# EAGLE board untitled (EAGLE 7.6.0)
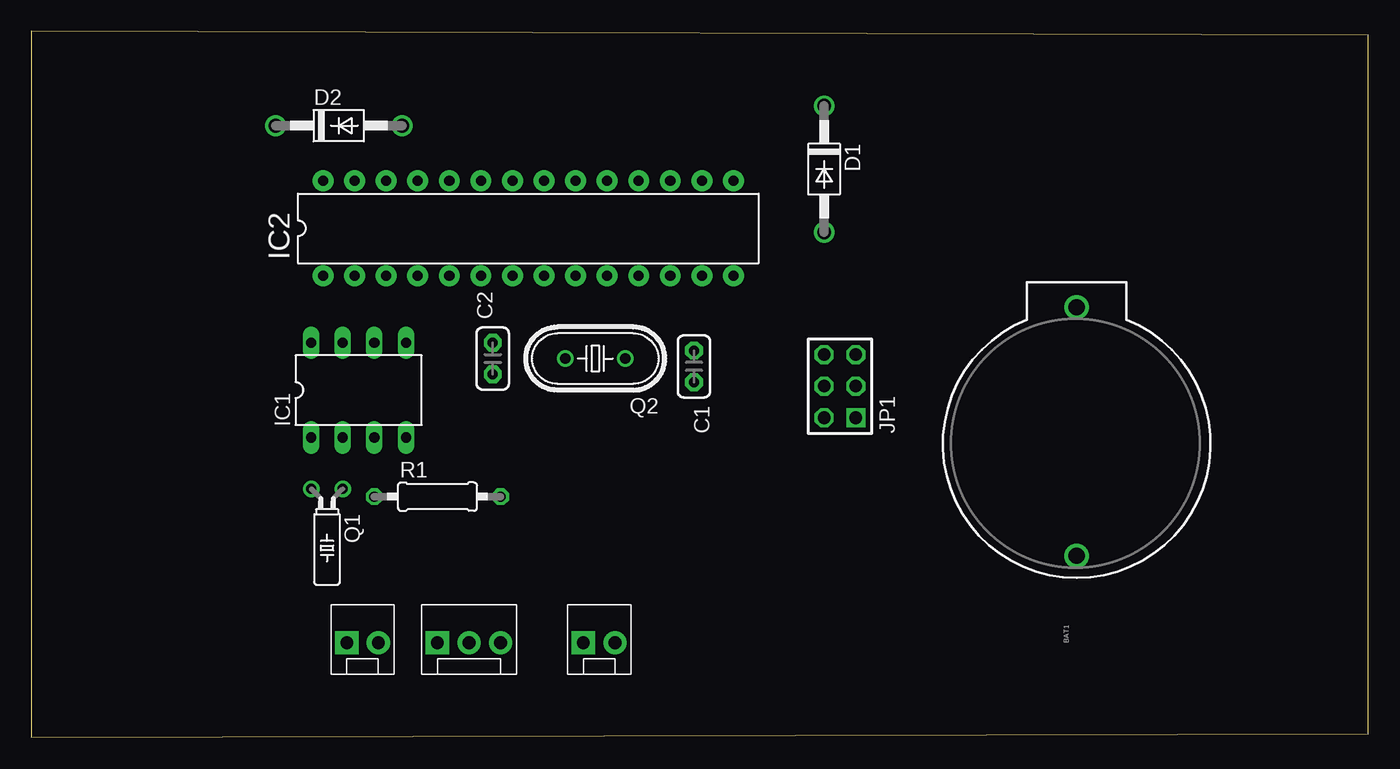
[diagram p0: board, top side]
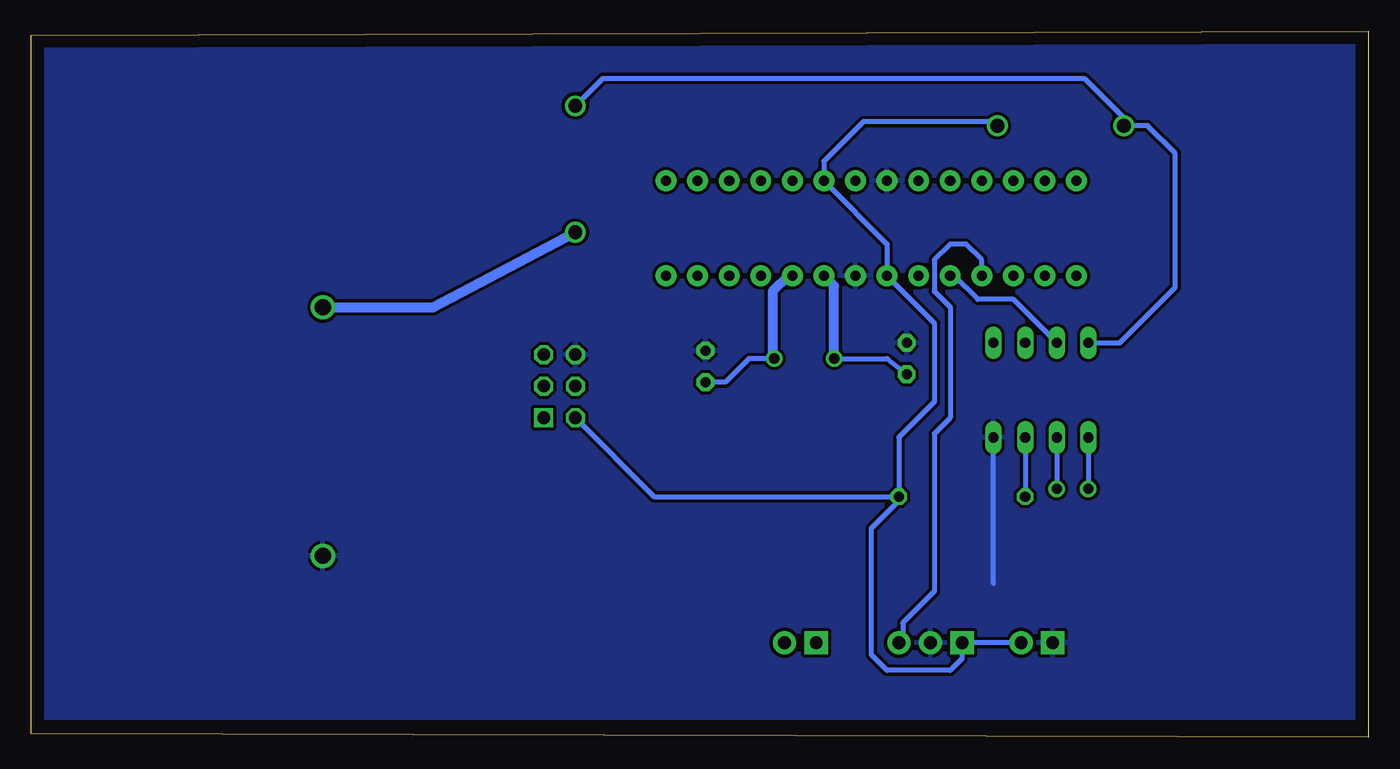
[diagram p1: board, bottom side, seen from below]

Size 107.61 x 56.82 mm. Coordinates in mm from the lower left corner, seen from the top.
Outline: 0,0 107.61,0.32 107.61,56.5 0,56.82 0,0
Copper layers (1*16): Top 0.035mm / dielectric 1.5mm / Bottom 0.035mm
Design rules "default": minimum track width 10mil, minimum drill 24mil, track to track 8mil, track to pad 8mil, pad to pad 8mil, via to via 8mil, smd to smd 8mil, copper to edge 40mil, drill to drill 8mil, minimum pad ring 10mil, minimum via ring 8mil, stop-mask expansion 4mil, vias tented up to drill 0mil, thermal gap 10mil

## Footprints (pad centres in the part's own frame; a part is rotated, then mirrored left to right if it is on the bottom)
BATTCOM_20MM_PTH = drill 1.3: 1 20,0; 2 0,0
C025-050X025 = drill 0.813 pad 1.422 octagon: 1 -1.27,0; 2 1.27,0
DO41-10 = drill 1.118: A 5.08,0; C -5.08,0
DIL08 = drill 0.813 long: 1 -3.81,-3.81; 2 -1.27,-3.81; 3 1.27,-3.81; 4 3.81,-3.81; 5 3.81,3.81; 6 1.27,3.81; 7 -1.27,3.81; 8 -3.81,3.81
DIL28-3-ROUND = drill 0.813 pad 1.676: 1 -16.51,-3.81; 2 -13.97,-3.81; 3 -11.43,-3.81; 4 -8.89,-3.81; 5 -6.35,-3.81; 6 -3.81,-3.81; 7 -1.27,-3.81; 8 1.27,-3.81; 9 3.81,-3.81; 10 6.35,-3.81; 11 8.89,-3.81; 12 11.43,-3.81; 13 13.97,-3.81; 14 16.51,-3.81; 15 16.51,3.81; 16 13.97,3.81; 17 11.43,3.81; 18 8.89,3.81; 19 6.35,3.81; 20 3.81,3.81; 21 1.27,3.81; 22 -1.27,3.81; 23 -3.81,3.81; 24 -6.35,3.81; 25 -8.89,3.81; 26 -11.43,3.81; 27 -13.97,3.81; 28 -16.51,3.81
AVR-ISP-6 = drill 1.016 square: 1 -2.54,-1.27 | drill 1.016 octagon: 2 -2.54,1.27; 3 0,-1.27; 4 0,1.27; 5 2.54,-1.27; 6 2.54,1.27
MOLEX-1X2 = drill 1.016 pad 1.88 square: 1 0,0 | drill 1.016 pad 1.88: 2 2.54,0
MOLEX-1X3 = drill 1.016 pad 1.88 square: 1 0,0 | drill 1.016 pad 1.88: 2 2.54,0; 3 5.08,0
TC26H = drill 0.813: 1 -1.27,0; 2 1.27,0
HC49U70 = drill 0.813: 1 -2.413,0; 2 2.413,0
0207/10 = drill 0.813 octagon: 1 -5.08,0; 2 5.08,0

## Placement (x,y rotation side)
BAT1  [BATTCOM_20MM_PTH]  84.14,14.61 90 top
C1  18pF  [C025-050X025]  53.34,29.85 270 top
C2  18pF  [C025-050X025]  37.15,30.48 90 top
D1  1N4004  [DO41-10]  63.82,45.72 270 top
D2  1N4004  [DO41-10]  24.76,49.21 0 top
FRAME1  FRAME-LETTER  [CREATIVE_COMMONS]  55.24,-26.35 0 top  (outside the outline)
IC1  PCF8583P  [DIL08]  26.35,27.94 0 top
IC2  ATMEGA328PROUND  [DIL28-3-ROUND]  40,40.96 0 top
JP1  AVR-ISP-6  [AVR-ISP-6]  65.09,28.26 90 top
JP2  [MOLEX-1X2]  44.45,7.62 0 top
JP3  [MOLEX-1X3]  32.7,7.62 0 top
JP4  [MOLEX-1X2]  25.4,7.62 0 top
Q1  32.768kHz  [TC26H]  23.81,20 180 top
Q2  16MHz  [HC49U70]  45.4,30.48 180 top
R1  10k  [0207/10]  32.7,19.37 0 top

## Library data of the parts
BAT1 JP2-JP4 = SparkFun
C1 C2 = cap-master
D1 D2 = diode
FRAME1 = SparkFun-Aesthetics
IC1 = ds1307_pcf8583
IC2 = atmega328
JP1 = atmel-1
Q1 Q2 = crystal; OC_FARNELL: unknown; OC_NEWARK: unknown
R1 = resistor

## Nets
CLK_INT: IC1.7 IC2.5
ENCODER: IC2.4 JP3.3
GND: BAT1.2 C1.1 C2.2 IC1.4 IC2.8 IC2.22 JP1.6 JP3.2 JP4.1
MISO: JP1.1
MOSI: JP1.4
MOTOR+: JP2.2
MOTOR-: JP2.1
N$1: D1.C D2.C IC1.8
N$2: IC1.1 Q1.2
N$3: IC1.2 Q1.1
N$5: BAT1.1 D1.A
N$6: IC1.3 R1.1
N$7: C2.1 IC2.9 Q2.2
N$8: C1.2 IC2.10 Q2.1
N$10: JP1.5
RX: IC2.2
SCK: JP1.3
SCL: IC1.6
SDA: IC1.5
TX: IC2.3
VCC: D2.A IC2.7 IC2.20 JP1.2 JP3.1 JP4.2 R1.2

## Tracks (layer width: path | path; a pad name or v marks a point on that pad's centre or on a via)
CLK_INT
  Bottom 0.406: IC1.7 28.57,35.24 31.43,35.24 33.34,37.15 IC2.5
ENCODER
  Bottom 0.406: IC2.4 31.11,38.42 32.39,39.69 33.66,39.69 34.92,38.42 34.92,35.88 33.66,34.61 33.66,25.72 34.92,24.45 34.92,11.75 37.47,9.21 37.47,7.94 JP3.3
GND
  Bottom 0.406: 30.16,12.38 IC1.4
  pour Bottom (isolate 0.254): 0.63,56.2 0.63,1.59 107.31,1.59 107.31,56.2
N$1
  Bottom 0.406: D1.C 61.59,53.02 22.86,53.02 19.68,49.85 D2.C 17.78,49.21 15.56,46.99 15.56,36.2 20,31.75 IC1.8
N$2
  Bottom 0.406: IC1.1 Q1.2
N$3
  Bottom 0.406: IC1.2 Q1.1
N$5
  Bottom 0.813: BAT1.1 75.25,34.6 D1.A
N$6
  Bottom 0.406: IC1.3 R1.1
N$7
  Bottom 0.406: Q2.2 38.73,30.48 C2.1
  Bottom 0.813: Q2.2 42.99,36.32 IC2.9
N$8
  Bottom 0.406: Q2.1 49.85,30.48 51.75,28.57 C1.2
  Bottom 0.813: IC2.10 46.67,37.15 47.94,35.88 47.94,30.61 Q2.1
VCC
  Bottom 0.406: D2.A 30.16,49.53 40.64,49.53 43.81,46.36 IC2.20 38.73,39.69 IC2.7 34.92,33.34 34.92,26.99 37.78,24.13 R1.2 | JP1.2 57.47,19.37 R1.2 | R1.2 37.78,19.05 40,16.83 40,6.67 38.73,5.4 33.66,5.4 32.7,6.35 JP3.1 JP4.2